# Altium PCB XT Wonder.PcbDoc
Units mil, origin at the board's own origin, x right, y up, seen from the top; angles counter-clockwise.
Board outline 6000 x 4000 mil, 2 copper layers (Top Layer, Bottom Layer); 1 components, 0 nets, 160 pads, 0 vias.
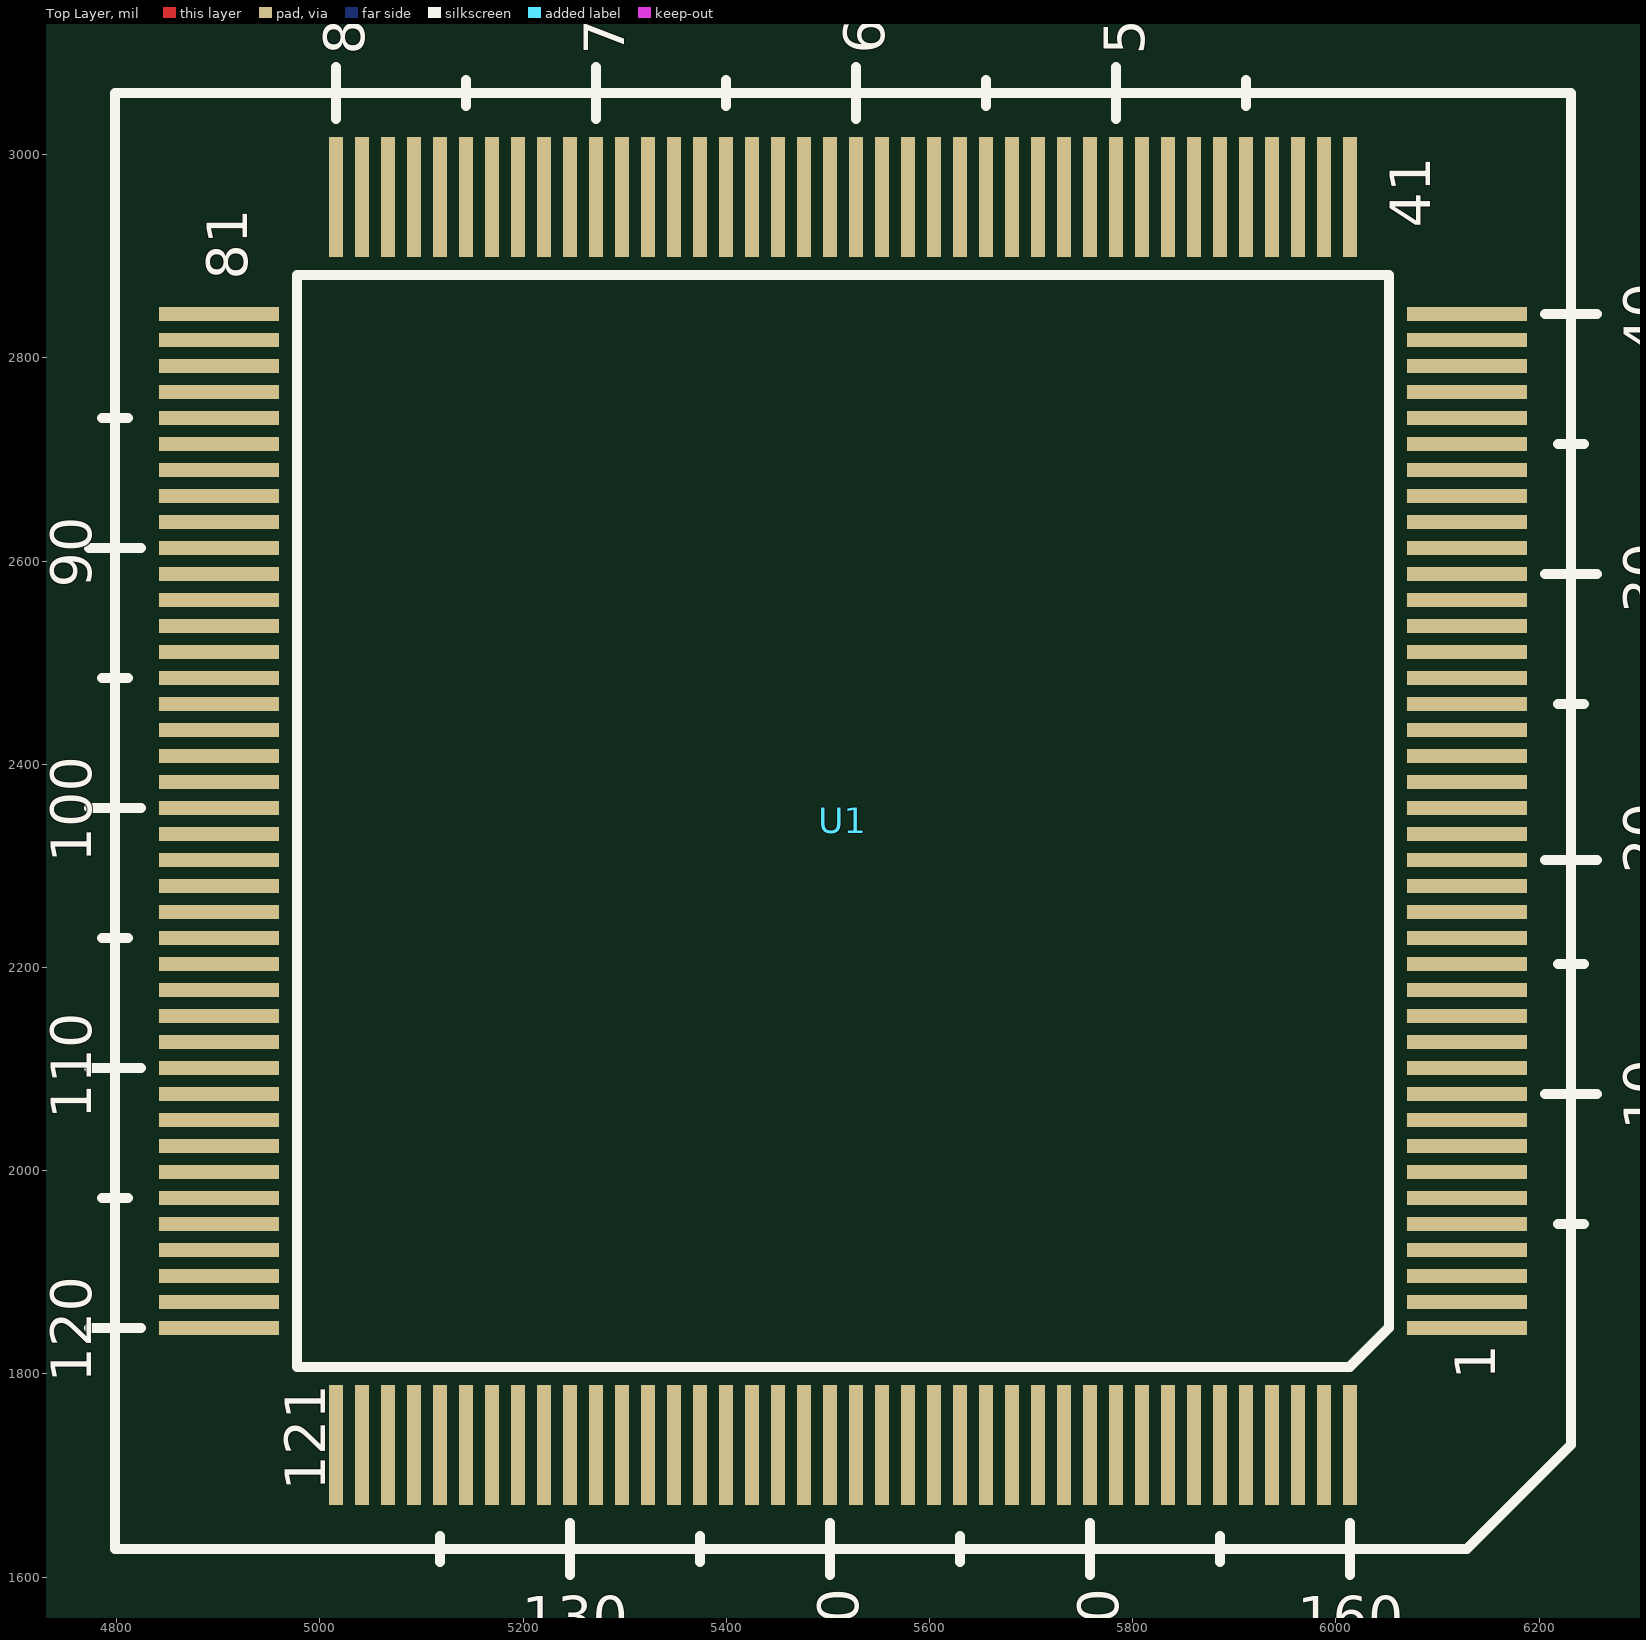
[diagram p0: Top Layer view]
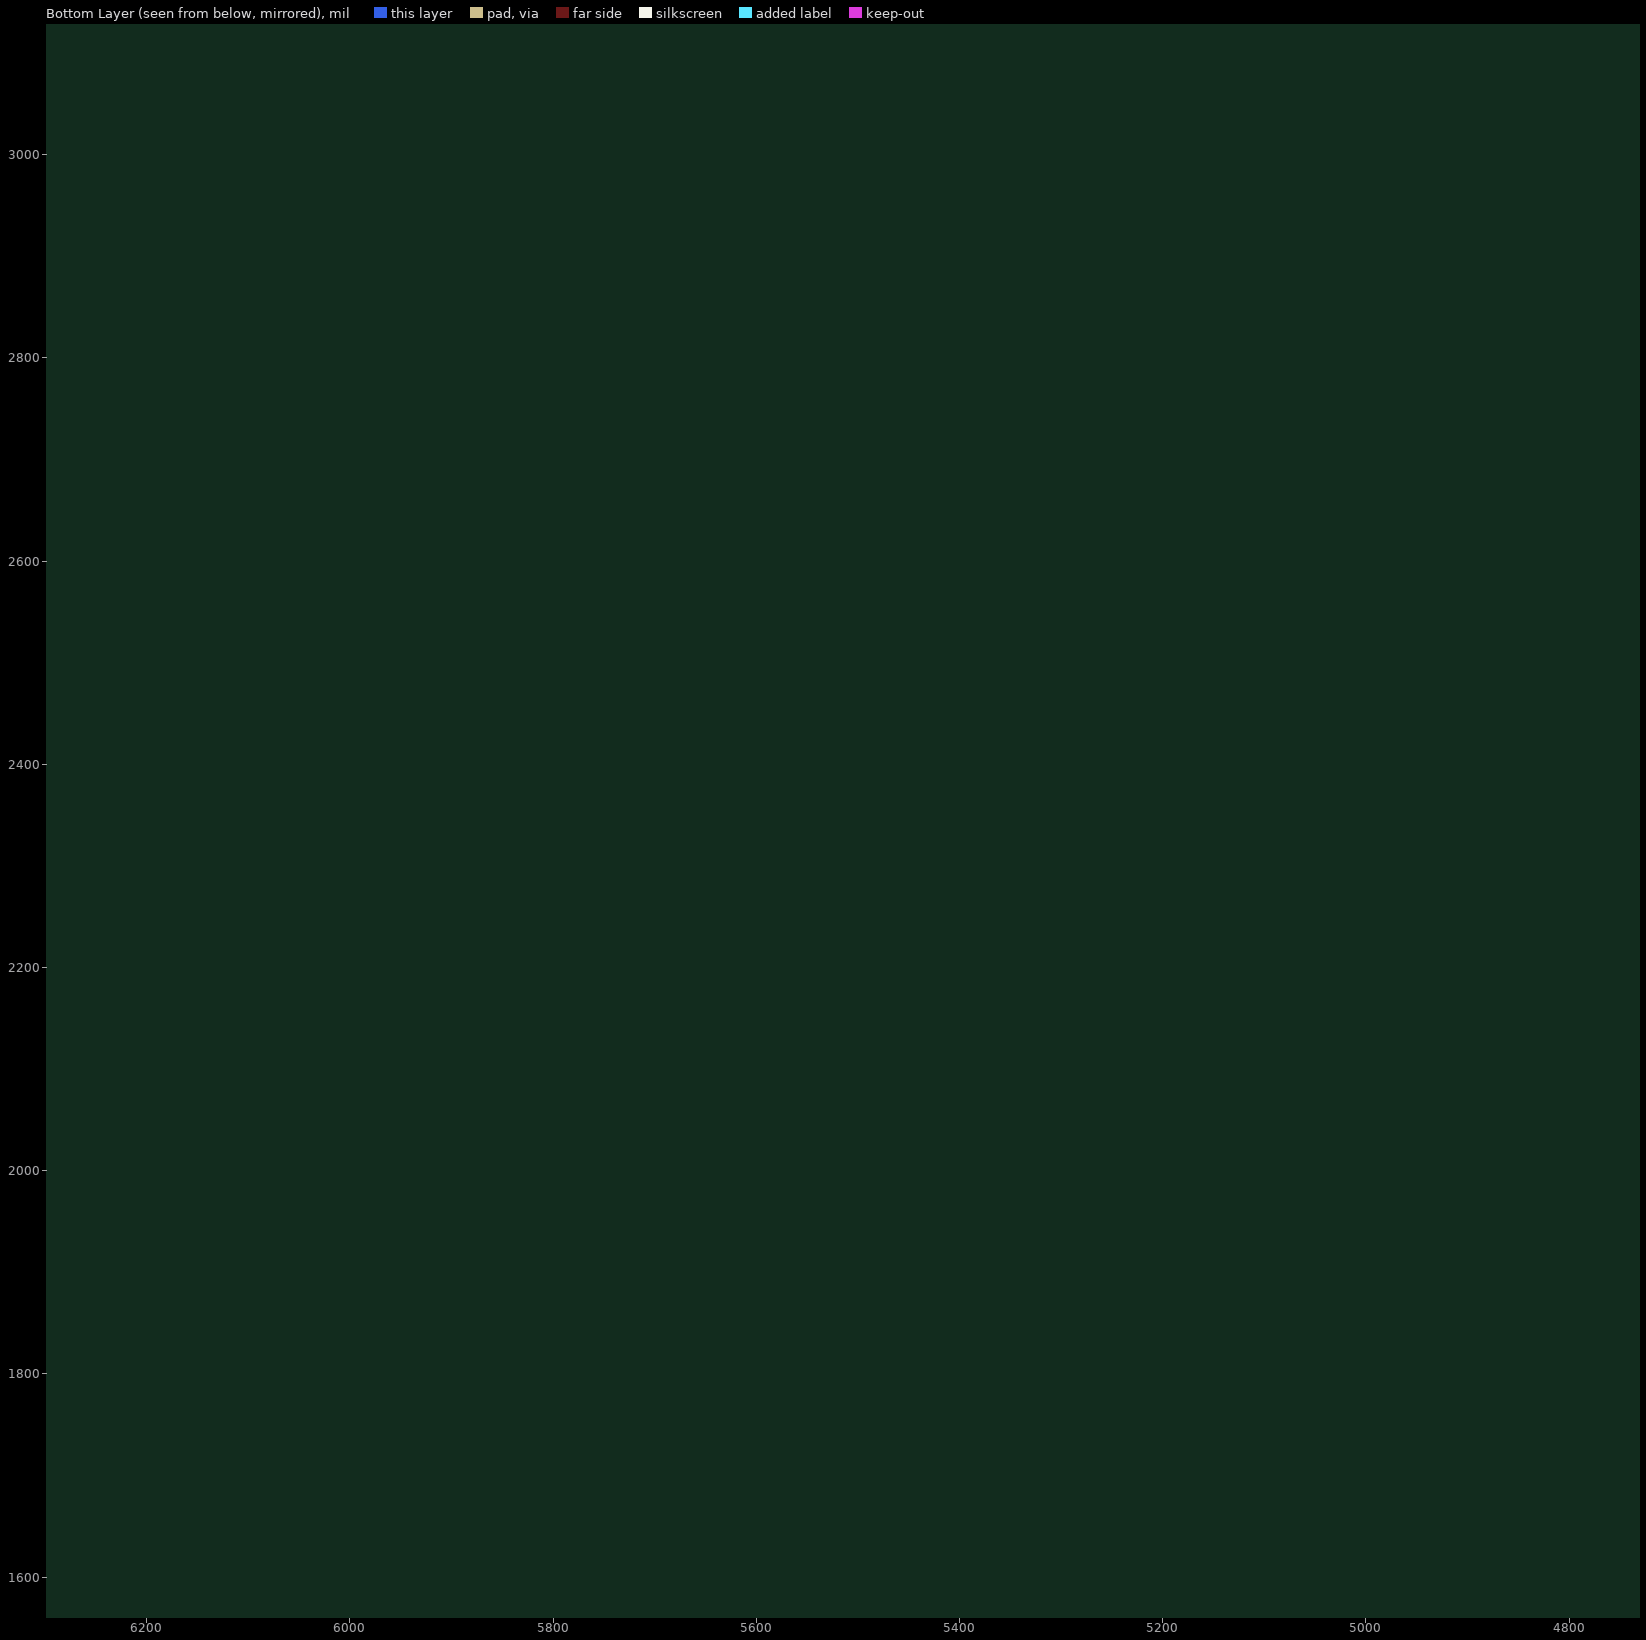
[diagram p1: Bottom Layer view, seen from below]

## Layer stack, top to bottom
Top Solder: solder mask 0.4, Solder Resist, Dk 3.5
Top Layer: signal copper 1.4
Dielectric 1: dielectric 12.6, FR-4, Dk 4.8
Bottom Layer: signal copper 1.4
Bottom Solder: solder mask 0.4, Solder Resist, Dk 3.5

## Board outline
1000,1000 7000,1000 7000,5000 1000,5000

## Design rules (kind name [scope] priority, off if disabled: settings)
Clearance [All] p1: gap=10 ignorepadtopadclearanceinfootprint=FALSE except(0: Arc-Hole Track-Hole SMDPad-Hole THPad-Hole Via-Hole Fill-Hole Poly-Hole Region-Hole Text-Hole)
PolygonConnect [All] p1: connectstyle=Relief reliefconductorwidth=10 reliefentries=4 polygonreliefangle="90 Angle" airgapwidth=10
RoomDefinition "XT Wonder" [InComponentClass('XT Wonder')] p1: confinementstyle=ConfineIn formatcopy=TRUE lockcomponents=FALSE outline 3385,1060 6750,1060 6750,4065 3385,4065
RoutingVias [All] p1: holewidth=28 width=50 viastyle="Through Hole" minholewidth=28 minwidth=50 maxholewidth=28 maxwidth=50
SolderMaskExpansion [All] p1: expansion=4 istentingtop=FALSE
Width [All] p1: maxlimit=10 minlimit=10 preferedwidth=10
30 further rules are at their usual default settings.

## Components (designator, comment, footprint, x,y, rotation, side; value= is the part's Value field where it differs from the comment)
U1 "TVGA9000I" TVGA9000 4794.8,1624.2 r0 top

## Footprints (in the part's own frame and the unit in brackets; to place one, negate y for a bottom-side part, rotate by r counter-clockwise, add the part's x,y. Pads: shape width x height; smd on the part's side, far side on the other; paste and mask are expansions set on the pad)
TVGA9000 [mil] "TVGA9000i Footprint"
  rect 118.1x13.8 smd mask+10: 1(1334.2,221) 2(1334.2,246.6) 3(1334.2,272.2) 4(1334.2,297.8) 5(1334.2,323.4) 6(1334.2,349) 7(1334.2,374.6) 8(1334.2,400.1) 9(1334.2,425.7) 10(1334.2,451.3) 11(1334.2,476.9) 12(1334.2,502.5) 13(1334.2,528.1) 14(1334.2,553.7) 15(1334.2,579.3) 16(1334.2,604.9) 17(1334.2,630.5) 18(1334.2,656.1) 19(1334.2,681.6) 20(1334.2,707.2) 21(1334.2,732.8) 22(1334.2,758.4) 23(1334.2,784) 24(1334.2,809.6) 25(1334.2,835.2) 26(1334.2,860.8) 27(1334.2,886.4) 28(1334.2,912) 29(1334.2,937.5) 30(1334.2,963.1) 31(1334.2,988.7) 32(1334.2,1014.3) 33(1334.2,1039.9) 34(1334.2,1065.5) 35(1334.2,1091.1) 36(1334.2,1116.7) 37(1334.2,1142.3) 38(1334.2,1167.9) 39(1334.2,1193.5) 40(1334.2,1219) 81(105.8,1219) 82(105.8,1193.4) 83(105.8,1167.8) 84(105.8,1142.2) 85(105.8,1116.6) 86(105.8,1091.1) 87(105.8,1065.5) 88(105.8,1039.9) 89(105.8,1014.3) 90(105.8,988.7) 91(105.8,963.1) 92(105.8,937.5) 93(105.8,911.9) 94(105.8,886.3) 95(105.8,860.7) 96(105.8,835.2) 97(105.8,809.6) 98(105.8,784) 99(105.8,758.4) 100(105.8,732.8) 101(105.8,707.2) 102(105.8,681.6) 103(105.8,656) 104(105.8,630.4) 105(105.8,604.8) 106(105.8,579.2) 107(105.8,553.7) 108(105.8,528.1) 109(105.8,502.5) 110(105.8,476.9) 111(105.8,451.3) 112(105.8,425.7) 113(105.8,400.1) 114(105.8,374.5) 115(105.8,348.9) 116(105.8,323.3) 117(105.8,297.8) 118(105.8,272.2) 119(105.8,246.6) 120(105.8,221)
  rect 13.8x118.1 smd mask+10: 41(1219,1334.2) 42(1193.4,1334.2) 43(1167.8,1334.2) 44(1142.2,1334.2) 45(1116.7,1334.2) 46(1091.1,1334.2) 47(1065.5,1334.2) 48(1039.9,1334.2) 49(1014.3,1334.2) 50(988.7,1334.2) 51(963.1,1334.2) 52(937.5,1334.2) 53(911.9,1334.2) 54(886.3,1334.2) 55(860.8,1334.2) 56(835.2,1334.2) 57(809.6,1334.2) 58(784,1334.2) 59(758.4,1334.2) 60(732.8,1334.2) 61(707.2,1334.2) 62(681.6,1334.2) 63(656,1334.2) 64(630.4,1334.2) 65(604.8,1334.2) 66(579.2,1334.2) 67(553.7,1334.2) 68(528.1,1334.2) 69(502.5,1334.2) 70(476.9,1334.2) 71(451.3,1334.2) 72(425.7,1334.2) 73(400.1,1334.2) 74(374.5,1334.2) 75(348.9,1334.2) 76(323.3,1334.2) 77(297.8,1334.2) 78(272.2,1334.2) 79(246.6,1334.2) 80(221,1334.2) 121(221,105.8) 122(246.6,105.8) 123(272.2,105.8) 124(297.8,105.8) 125(323.3,105.8) 126(348.9,105.8) 127(374.5,105.8) 128(400.1,105.8) 129(425.7,105.8) 130(451.3,105.8) 131(476.9,105.8) 132(502.5,105.8) 133(528.1,105.8) 134(553.7,105.8) 135(579.2,105.8) 136(604.8,105.8) 137(630.4,105.8) 138(656,105.8) 139(681.6,105.8) 140(707.2,105.8) 141(732.8,105.8) 142(758.4,105.8) 143(784,105.8) 144(809.6,105.8) 145(835.2,105.8) 146(860.7,105.8) 147(886.3,105.8) 148(911.9,105.8) 149(937.5,105.8) 150(963.1,105.8) 151(988.7,105.8) 152(1014.3,105.8) 153(1039.9,105.8) 154(1065.5,105.8) 155(1091.1,105.8) 156(1116.6,105.8) 157(1142.2,105.8) 158(1167.8,105.8) 159(1193.4,105.8) 160(1219,105.8)
  silkscreen extent -22,-22 1462,1462

## Nets (pads, with @x,y where several pads share a name; then routed paths per layer and width w, separated by ;. In a path a pad name is that pad's centre, name@x,y a point inside that pad or via, vN(x,y) a via of type N, cw(c..) or ccw(c..) an arc to the next point about the centre after c; other vN are vias at no path point)
pads on no net: U1.1 U1.2 U1.3 U1.4 U1.5 U1.6 U1.7 U1.8 U1.9 U1.10 U1.11 U1.12 U1.13 U1.14 U1.15 U1.16 U1.17 U1.18 U1.19 U1.20 U1.21 U1.22 U1.23 U1.24 U1.25 U1.26 U1.27 U1.28 U1.29 U1.30 U1.31 U1.32 U1.33 U1.34 U1.35 U1.36 U1.37 U1.38 U1.39 U1.40 U1.41 U1.42 U1.43 U1.44 U1.45 U1.46 U1.47 U1.48 U1.49 U1.50 U1.51 U1.52 U1.53 U1.54 U1.55 U1.56 U1.57 U1.58 U1.59 U1.60 U1.61 U1.62 U1.63 U1.64 U1.65 U1.66 U1.67 U1.68 U1.69 U1.70 U1.71 U1.72 U1.73 U1.74 U1.75 U1.76 U1.77 U1.78 U1.79 U1.80 U1.81 U1.82 U1.83 U1.84 U1.85 U1.86 U1.87 U1.88 U1.89 U1.90 U1.91 U1.92 U1.93 U1.94 U1.95 U1.96 U1.97 U1.98 U1.99 U1.100 U1.101 U1.102 U1.103 U1.104 U1.105 U1.106 U1.107 U1.108 U1.109 U1.110 U1.111 U1.112 U1.113 U1.114 U1.115 U1.116 U1.117 U1.118 U1.119 U1.120 U1.121 U1.122 U1.123 U1.124 U1.125 U1.126 U1.127 U1.128 U1.129 U1.130 U1.131 U1.132 U1.133 U1.134 U1.135 U1.136 U1.137 U1.138 U1.139 U1.140 U1.141 U1.142 U1.143 U1.144 U1.145 U1.146 U1.147 U1.148 U1.149 U1.150 U1.151 U1.152 U1.153 U1.154 U1.155 U1.156 U1.157 U1.158 U1.159 U1.160

## Text inside footprints (layer, text, board x,y; h text height)
U1: Top Overlay "1" at 6157,1794.04 h40 r90; Top Overlay "160" at 5962.05,1541.2 h40; Top Overlay "40" at 6323.3,2804.06 h40 r90; Top Overlay "10" at 6323.3,2039.51 h40 r90; Top Overlay "20" at 6323.3,2292.26 h40 r90; Top Overlay "30" at 6323.3,2548.16 h40 r90; Top Overlay "41" at 6093,2927.83 h40 r90; Top Overlay "81" at 4928.6,2876.63 h40 r90; Top Overlay "121" at 5005.4,1684.77 h40 r90; Top Overlay "50" at 5811.5,3098.36 h40 r90; Top Overlay "60" at 5555.6,3099.41 h40 r90; Top Overlay "70" at 5299.7,3098.36 h40 r90; Top Overlay "80" at 5043.8,3098.36 h40 r90; Top Overlay "90" at 4775.1,2573.76 h40 r90; Top Overlay "100" at 4775.1,2303.2 h40 r90; Top Overlay "110" at 4775.1,2050.44 h40 r90; Top Overlay "120" at 4775.1,1791.4 h40 r90; Top Overlay "130" at 5198.5,1541.2 h40; Top Overlay "140" at 5530,1484.3 h40 r90; Top Overlay "150" at 5785.9,1484.3 h40 r90